# Altium PCB PCB_Project1.PcbDoc
Units mm, origin at the board's own origin, x right, y up, seen from the top; angles counter-clockwise.
Board outline 81.08 x 45.82 mm, 2 copper layers (Top Layer, Bottom Layer); 37 components, 25 nets, 139 pads, 5 vias.
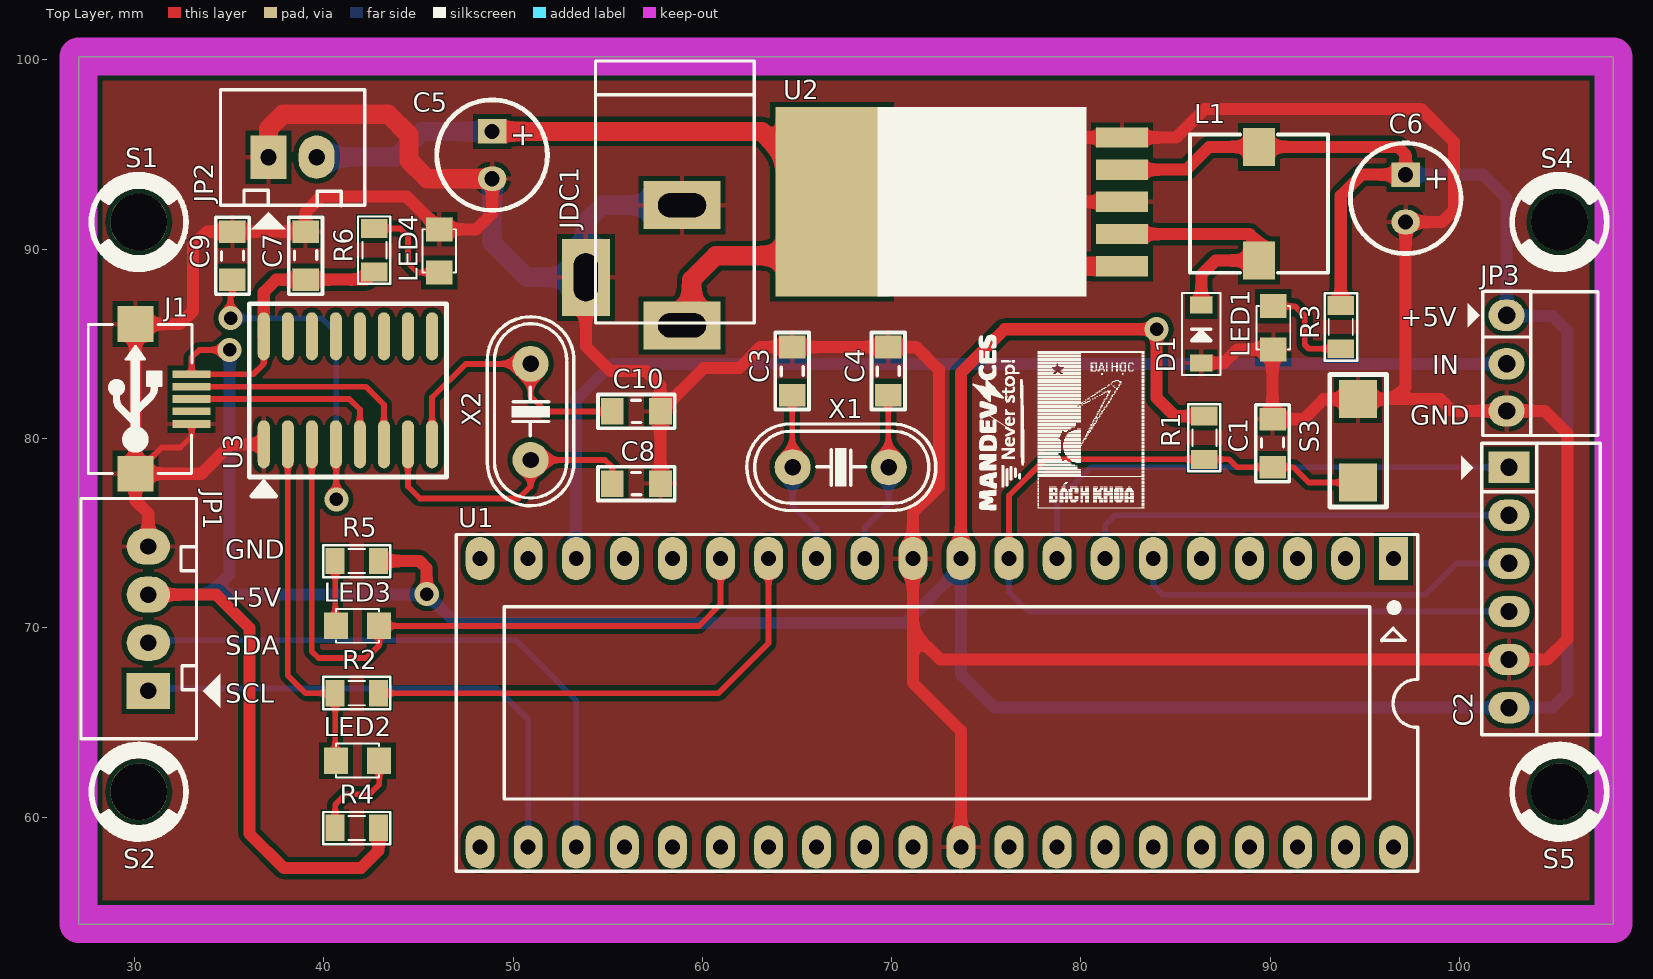
[diagram p0: Top Layer view]
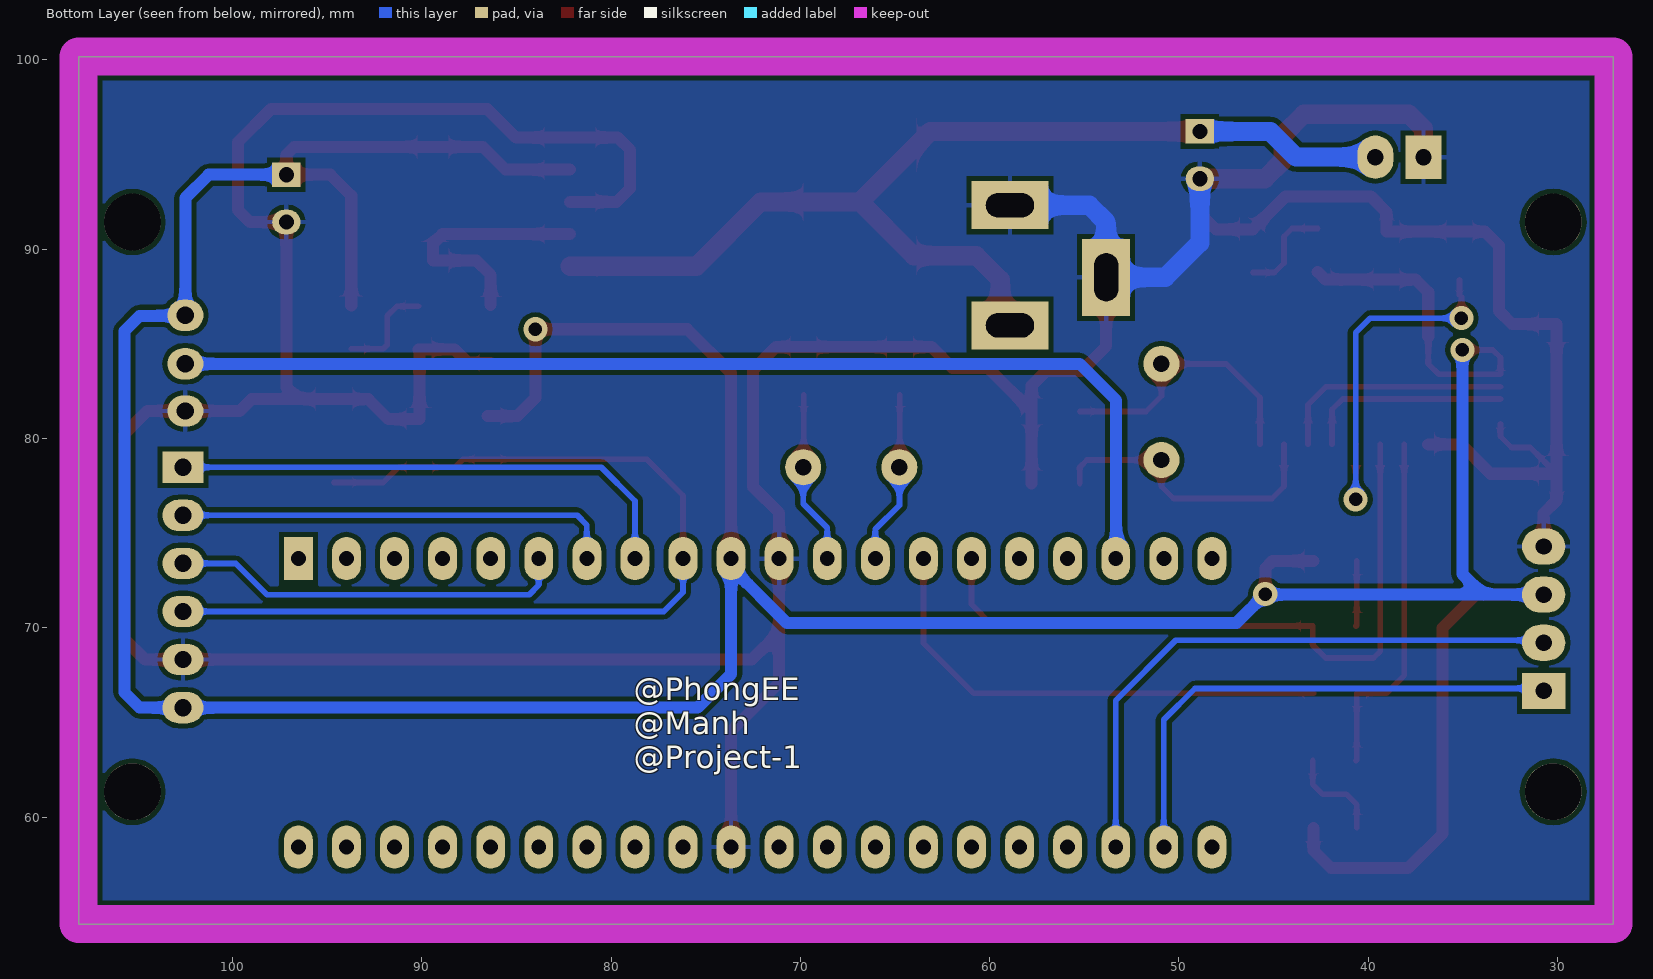
[diagram p1: Bottom Layer view, seen from below]
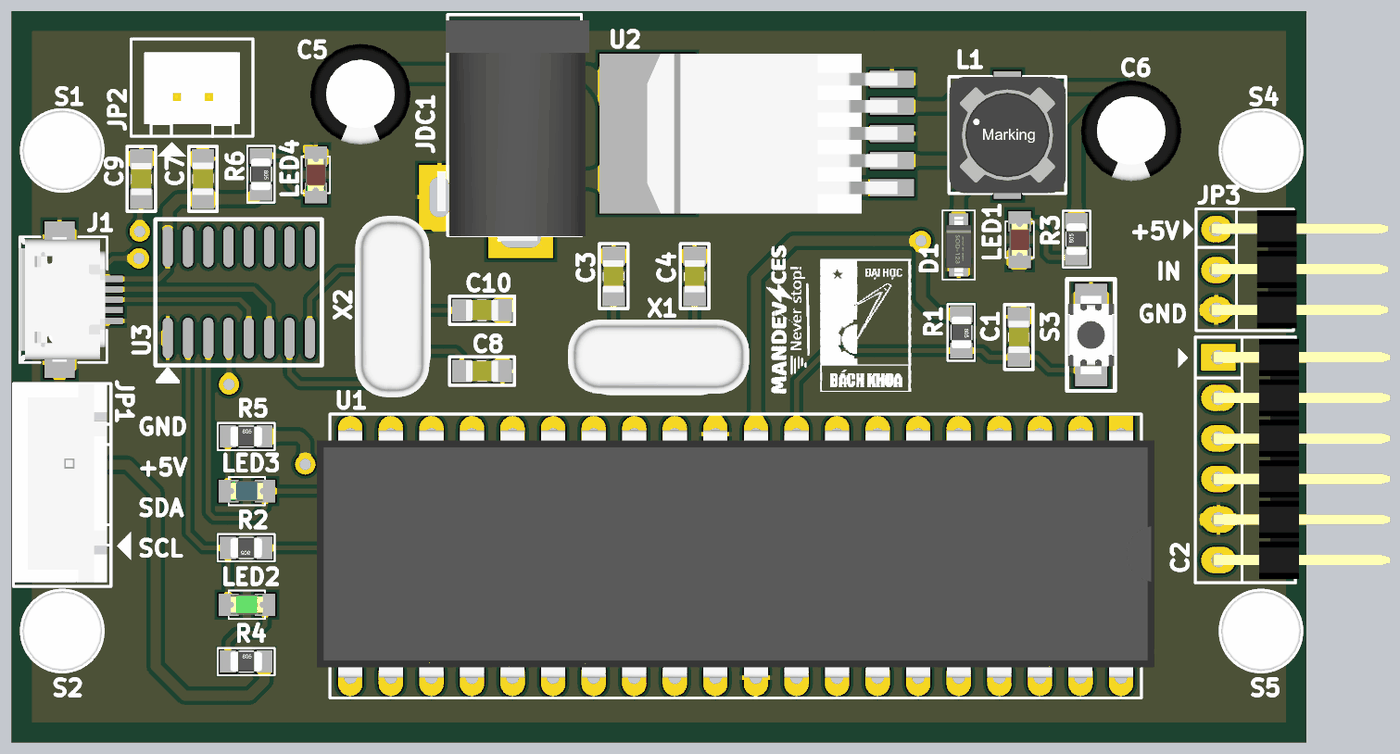
[diagram p2: 3D render of the assembled board from above, using the file's embedded part models]

## Layer stack, top to bottom
Top Solder: solder mask 0.0102, Solder Resist, Dk 3.5
Top Layer: signal copper 0.0356
Dielectric 1: dielectric 0.32, FR-4, Dk 4.8
Bottom Layer: signal copper 0.0356
Bottom Solder: solder mask 0.0102, Solder Resist, Dk 3.5

## Board outline
27.051,54.356 27.051,100.178 108.128,100.178 108.128,54.356

## Design rules (kind name [scope] priority, off if disabled: settings)
Clearance [All] p1: gap=0.254 ignorepadtopadclearanceinfootprint=TRUE
PolygonConnect [All] p1: connectstyle=Relief reliefconductorwidth=0.254 reliefentries=4 polygonreliefangle="90 Angle" airgapwidth=0.254
RoutingVias [All] p1: holewidth=1.016 width=1.27 viastyle="Through Hole" minholewidth=0.381 minwidth=1.27 maxholewidth=1.016 maxwidth=1.27
SolderMaskExpansion [All] p1: expansion=0.102
Width [All] p1: maxlimit=1.016 minlimit=0.305 preferedwidth=0.635
30 further rules are at their usual default settings.

## Classes and differential pairs
component class Master_Transmit: C7 C8 C9 C10 J1 LED2 LED3 LED4 R4 R5 R6 U3 X2
component class Master_Sensor: JP3
component class Master_Power_Supply: C5 C6 D1 JDC1 JP2 L1 LED1 R3 U2
component class Master_MCU: C1 C2 C3 C4 R1 R2 S1 S2 S3 S4 S5 U1 X1
component class Master_Display: JP1

## Components (designator, comment, footprint, x,y, rotation, side; value= is the part's Value field where it differs from the comment)
C1 "106" CAP_0805 90.095,79.756 r90 top value=33p
C2 "Header6" JP6H 102.616,78.486 r270 top
C3 "22pF" CAP_0805 64.77,83.566 r270 top value=33p
C4 "22pF" CAP_0805 69.85,83.566 r270 top value=33p
C5 "100uF/50V" C8mm 48.895,94.976 r270 top
C6 "220uF/50V" C8mm 97.155,92.69 r270 top
C7 "104" CAP_0805 39.014,89.662 r90 top value=33p
C8 "22pF" CAP_0805 56.515,77.597 r180 top value=33p
C9 "104" CAP_0805 35.204,89.662 r270 top value=33p
C10 "22pF" CAP_0805 56.515,81.407 r180 top value=33p
D1 "1N5822" DIO-SMD-123 86.36,85.522 r270 top value="Diode c?m 1N5408"
J1 "USB-5" USB-M1 33.02,82.093 r90 top
JDC1 "Jac DC" DC-IN 56.388,89.154 r270 top
JP1 "JP4" CON4 30.734,66.675 r90 top value="Connector 4"
JP2 "JP2" CON2 37.084,94.869 r0 top value="Connector 2"
JP3 "JP3" JP3H 102.489,86.512 r270 top value="Connector 3"
L1 "33.0 μH" L-SMD-M-7.3x4.5 89.408,92.408 r180 top
LED1 "LED" LED-0805-Red 90.17,86.995 r270 top value="LED 3 ly Single Colour"
LED2 "LED" LED-0805-Green 42.926,62.992 r180 top value="LED 3 ly Single Colour"
LED3 "LED" LED-0805-Blue 40.64,70.104 r0 top value="LED 3 ly Single Colour"
LED4 "LED" LED-0805-Red 46.101,88.771 r90 top value="LED 3 ly Single Colour"
R1 "10k" RES-SMD-0805 86.525,80.046 r270 top
R2 "1k5" RES-SMD-0805 41.745,66.548 r180 top
R3 "1k" RES-SMD-0805 93.726,85.89 r90 top
R4 "1k5" RES-SMD-0805 41.745,59.436 r0 top
R5 "1k5" RES-SMD-0805 41.745,73.533 r0 top
R6 "1k" RES-SMD-0805 42.672,89.952 r270 top
S1 "Screw" "Screw 3 small" 30.226,91.44 r0 top
S2 "Screw" "Screw 3 small" 30.226,61.341 r0 top
S3 "SW-SMD" "SW 3x2x4" 94.64,79.883 r90 top
S4 "Screw" "Screw 3 small" 105.283,91.44 r0 top
S5 "Screw" "Screw 3 small" 105.283,61.341 r0 top
U1 "ATmega32A-PU" DIP40/W0.6 96.52,73.66 r180 top
U2 "LM2976" TO263-5 82.144,92.505 r90 top
U3 "CH340G" SO16 41.275,82.55 r90 top
X1 "11.0592MHz" XT2 67.31,78.486 r180 top value=4Mhz
X2 "12Mhz" XT2 50.927,81.407 r270 top value=4Mhz

## Footprints (in the part's own frame and the unit in brackets; to place one, negate y for a bottom-side part, rotate by r counter-clockwise, add the part's x,y. Pads: shape width x height; smd on the part's side, far side on the other; paste and mask are expansions set on the pad)
C8mm [mm]
  rect 1.3x1.5 hole 0.8: 1(-1.25,0)
  oval 1.3x1.5 hole 0.8: 2(1.25,0)
  silkscreen extent -2.92,-2.92 2.92,2.92, body extent -3.15,-3.15 3.16,3.15, height 11.51
CAP_0805 [mm]
  rect 1.2x1.4 smd: 1(-1.27,-0.025) 2(1.27,-0.025)
  silkscreen extent -2.03,-0.91 2.03,0.86, body extent -1.01,-0.66 1.01,0.61, height 0.61
CON2 [mil] "CON2"
  rect 75x90 hole 34: 1(0,0)
  oval 75x90 hole 34: 2(100,0)
  silkscreen extent -100,-150 200,140, body extent -68,-70 168,107, height 236
CON4 [mil] "CON4"
  rect 75x90 hole 34: 1(0,0)
  oval 75x90 hole 34: 2(100,0) 3(200,0) 4(300,0)
  silkscreen extent -100,-150 400,140, body extent -90,-90 398,136, height 276
DC-IN [mil] "Jac DC input"
  rect 100x160 hole 50 slot 100 at 90 deg: 1(125,100) 2(-125,100)
  rect 160x100 hole 50 slot 100 at 0 deg: 3(25,-100)
  silkscreen extent -425,-80 120,250, body extent -410,-105 134,269, height 434
DIO-SMD-123 [mm]
  rect 0.9x1.2 smd: 1(1.524,0) 2(-1.524,0)
  silkscreen extent -2.16,-1.02 2.16,1.02, body extent -1.76,-0.8 1.94,0.8, height 1.25
DIP40/W0.6 [mil] "40 PIN, W 600mil, Pin to pin 100mil"
  rect 60x90 hole 31: 1(0,0)
  oval 60x90 hole 31: 2(100,0) 3(200,0) 4(300,0) 5(400,0) 6(500,0) 7(600,0) 8(700,0) 9(800,0) 10(900,0) 11(1000,0) 12(1100,0) 13(1200,0) 14(1300,0) 15(1400,0) 16(1500,0) 17(1600,0) 18(1700,0) 19(1800,0) 20(1900,0) 21(1900,600) 22(1800,600) 23(1700,600) 24(1600,600) 25(1500,600) 26(1400,600) 27(1300,600) 28(1200,600) 29(1100,600) 30(1000,600) 31(900,600) 32(800,600) 33(700,600) 34(600,600) 35(500,600) 36(400,600) 37(300,600) 38(200,600) 39(100,600) 40(0,600)
  silkscreen extent -50,-50 1950,650, body extent -82,-10 1982,600, height 224
JP3H [mil]
  oval 65x75 hole 36: 1(0,0) 2(101,0) 3(199,0)
  silkscreen extent -50,-81 250,190, body extent -47,-15 245,424, height 99
JP6H [mil]
  rect 65x85 hole 36: 1(0,0)
  oval 65x85 hole 36: 2(100,0) 3(200,0) 4(300,0) 5(400,0) 6(500,0)
  silkscreen extent -50,-99 556,190, body extent -46,-15 546,424, height 99
L-SMD-M-7.3x4.5 [mm] "WE-PDA SMD Shielded Power Inductor, 7345"
  rect 1.7x2 smd: 1(0,3) 2(0,-3)
  silkscreen extent -3.65,-3.65 3.65,3.65, body extent -3.65,-3.65 3.65,3.65, height 4.05
LED-0805-Blue [mil]
  rect 50x55 smd: 1(0,0) 2(90,0)
  silkscreen extent 0,-35 90,35, body extent 5,-25 85,25, height 43
LED-0805-Green [mil]
  rect 50x55 smd: 1(0,0) 2(90,0)
  silkscreen extent 0,-35 90,35, body extent 5,-25 85,25, height 43
LED-0805-Red [mil]
  rect 50x55 smd: 1(0,0) 2(90,0)
  silkscreen extent 0,-35 90,35, body extent 5,-25 85,25, height 43
RES-SMD-0805 [mil]
  rect 39.37x55 smd: 1(-45,0) 2(45,0)
  silkscreen extent -70,-34 70,33, body extent -39,-25 39,25, height 31
"Screw 3 small" [mm] "Hole 3mm, outline 5mm"
  round 3 hole 3 mask+0.1: 1(0,0)
  silkscreen extent -2.5,-2.5 2.5,2.5, body extent -2.5,-2.5 2.5,2.5, height 1.73
SO16 [mm]
  oval 2.54x0.635 smd: 1(-2.854,4.445) 2(-2.854,3.175) 3(-2.854,1.905) 4(-2.854,0.635) 5(-2.854,-0.635) 6(-2.854,-1.905) 7(-2.854,-3.175) 8(-2.854,-4.445) 9(2.854,-4.445) 10(2.854,-3.175) 11(2.854,-1.905) 12(2.854,-0.635) 13(2.854,0.635) 14(2.854,1.905) 15(2.854,3.175) 16(2.854,4.445)
  silkscreen extent -5.59,-5.21 4.57,5.21, body extent -3.47,-4.95 3.47,4.95, height 1.75
"SW 3x2x4" [mm]
  rect 2x2 smd: 1(-2.2,0) 2(2.2,0)
  silkscreen extent -3.5,-1.5 3.5,1.5, body extent -2.45,-1.45 2.45,1.45, height 2
TO263-5 [mm] "LM2576-SMD"
  rect 1.07x2.75 smd: 1(-3.4,-0.025) 2(-1.7,-0.025) 3(0,-0.025) 4(1.7,-0.025) 5(3.4,-0.025)
  rect 10x6 smd: 1(0,15.289)
  silkscreen extent -5,1.85 5,12.88, body extent -5,-0.38 5,15.29, height 4.79
USB-M1 [mm]
  rect 0.4x2 smd: 1(1.3,0) 2(0.65,0) 3(0,0) 4(-0.65,0) 5(-1.321,0)
  rect 1.9x1.9 smd: 5(-3.95,2.968) 5(3.95,2.968)
  silkscreen extent -3.94,-0.03 3.94,5.46, body extent -3.98,0.11 4,5.54, height 2.71
XT2 [mil] "Footpin for Crystal 2 pin"
  round 75 hole 34: 1(-100,0) 2(100,0)
  silkscreen extent -198,-90 195,90, body extent -233,-93 213,90, height 138

## Part data
C1 C3 C4 C7 C8 C9 C10: library part CapSMD, "Capacitor", LatestRevisionDate=17-Jul-2002, LatestRevisionNote="Re-released for DXP Platform.", PackageReference=RAD-0.3, Published=8-Jun-2000, Publisher="Altium Limited"
C2: "Header IDC, 6 x 1 Pin Vertical 2.54mm Pitch (Non-Boxed, Male)", Manufacturer="W¨¹rth Elektronik eiSos GmbH", partNo=613002143121, ComponentLink1 Description=Manufacturer, ComponentLink1URL=http://www.we-online.com, ComponentLink2 Description=Datasheet, ComponentLink2URL=http://katalog.we-online.de/em/datasheet/6130xx143121.pdf, Created by="Karrer Zheng", Created Date="29 March 2013", NoPins=02
C5 C6: library part "Cap Pol", "Polarized Capacitor (Axial)", LatestRevisionDate=17-Jul-2002, LatestRevisionNote="Re-released for DXP Platform.", PackageReference=POLAR0.8, Published=8-Jun-2000, Publisher="Altium Limited"
D1: "Schottky Rectifiers"
J1: Manufacturer=FCI, Manufacturer Part Number=10118193-0001LF, Supplier Part Number 1=609-4616-1-ND, .Checked PCB=RF, .Checked SCH=MM, .Creator=MM, Category="Connectors, Interconnects", ComponentLink1Description=http://portal.fciconnect.com/Comergent//fci/drawing/10118193.pdf, ComponentLink1URL=http://portal.fciconnect.com/Comergent//fci/drawing/10118193.pdf, Connector Type="USB - micro B", Features="Shielded, Solder Retention", Gender=Receptacle, Ingress Protection=-, Mounting Type="Surface Mount, Right Angle, Horizontal", Number of Contacts=5, Packaging="Cut Tape (CT)", Pricing 1="1=0.46, 10=0.433, 25=0.3712, 50=0.3156, 100=0.3032, 250=0.27224, 500=0.25988 (USD)", RoHS="RoHS Compliant", Specifications="USB 2.0", Stock 1=28642, Supplier 1=Digi-Key
JDC1: library part DCIN, "Jac DC input"
JP1: library part Con4, "Connector 4"
JP2: library part Con2, "Connector 2"
JP3: library part Con3, "Connector 3"
L1: library part L-SMD-1, Inductance="33.0 µH", Manufacturer="Wurth Elektronik", partNo=78477010, ComponentLink1Description=Manufacturer, ComponentLink1URL=http://www.we-online.de, ComponentLink2Description=Datasheet, ComponentLink2URL=http://katalog.we-online.de/pbs/datasheet/78477010.pdf, Created by="Baojun Chen", Created Date=Nov.2015
LED1 LED2 LED3 LED4: "LED Single colour Green and Red"
R1 R2 R3 R4 R5 R6: library part "Resistor - SMD", "Resistor", Manufacturer="Generic Components", Class=Passive, Published=08/06/2000, Publisher="Altium Hobart Technology Centre"
S3: "Switch", LatestRevisionDate=17-Jul-2002, LatestRevisionNote="Re-released for DXP Platform.", PackageReference=SPST-2, Published=24-Mar-1999, Publisher="Altium Limited"
U1: "8-Bit AVR Microcontroller with 32K Bytes of In-System Programmable Flash Memory", Supplier Part Number 1=ATMEGA32-16PC-ND, Code_JEDEC=MS-011-AC, ComponentLink1Description=Datasheet, ComponentLink1URL=http://www.atmel.com/dyn/resources/prod_documents/doc2503.pdf, ComponentLink2Description="Atmel.com Home", ComponentLink2URL=http://www.atmel.com, DatasheetVersion=2503C-AVR-10/02, PackageDescription="40-lead (0.600\"/15.24mm Wide) Plastic Dual Inline Package (PDIP)", PackageReference=40P6, PackageVersion="revB, Sep-2001", Published=17-Sep-2003, Publisher="Altium Limited", Supplier 1=Digi-Key, Supplier 2=Mouser, Supplier Part Number 2=556-ATMEGA32-16PC
U2: library part LM2596, Max Input Voltage="12 V", Max Output Current="3 (6.0 peak) A", Max Output Voltage=mV, Temperature Range="-40 to +125 degC", Category=IC-Power, Min Input Voltage=mV, Min Output Voltage=mV, Mounting Technology="Surface Mount", Status=Unreleased, Supply Voltage=mV
U3: "High and Low Side Driver", ComponentLink1Description="Manufacturer Link", ComponentLink1URL=http://www.irf.com/, ComponentLink2Description=Datasheet, ComponentLink2URL=http://www.irf.com/product-info/datasheets/data/ir2110.pdf, DatasheetVersion=PD60147J, LatestRevisionDate=04-Mar-2005, LatestRevisionNote="Stylized 3D Model Added.", Note="Pins 4, 8 and 14 are not connected", PackageDescription="DIP; 14 Leads; Row Spacing 7.62 mm; Pitch 2.54 mm", PackageReference=PDIP14, Published=8-Jun-2000, Publisher="Altium Limited"
X1 X2: library part XT2, "Crystal For all Crystal 2pin."

## Via types
v1: diameter 1.27, hole 0.711, Top Layer to Bottom Layer, 5 vias

## Nets (pads, with @x,y where several pads share a name; then routed paths per layer and width w, separated by ;. In a path a pad name is that pad's centre, name@x,y a point inside that pad or via, vN(x,y) a via of type N, cw(c..) or ccw(c..) an arc to the next point about the centre after c; other vN are vias at no path point)
+5: C2.6 C6.1 C7.1 J1.1 JP1.3 JP3.1 L1.2 R1.1 R3.2 R4.2 R5.2 R6.2 U1.10 U2.4 U3.16 | length 233.5
  Top Layer w0.305: v1(35.027,84.684) 33.426,84.684 33.02,84.277 J1.1 36.276,83.393 36.83,83.947 U3.16
  Top Layer w0.635: JP1.3 34.315,71.755 36.068,70.002 36.068,59.131 37.897,57.302 41.961,57.302 42.888,58.229 R4.2 ; U3.16 36.83,87.732 37.49,88.392 C7.1 42.254,88.392 R6.2 ; R5.2 45.06,73.533 45.441,73.152 v1(45.441,71.78) ; U1.10 73.66,83.464 75.971,85.776 v1(83.998,85.776) 83.998,82.144 84.952,81.19 R1.1 ; U2.4 85.569,94.205 86.772,95.408 L1.2 96.743,95.408 97.155,94.996 C6.1 94.829,93.94 93.726,92.837 R3.2
  Bottom Layer w0.635: JP1.3 33.934,71.755 ; v1(35.027,84.684) 35.027,72.847 33.934,71.755 ; U1.10 U1.10@73.66,73.203 ; C6.1 101.259,93.94 102.489,92.71 JP3.1 102.514,86.487 104.902,86.487 105.715,85.674 105.715,66.599 104.902,65.786 C2.6 75.438,65.786 73.66,67.564 U1.10@73.66,73.203 ; 33.934,71.755 45.415,71.755 v1(45.441,71.78) 46.965,70.256 70.714,70.256 U1.10@73.66,73.203
+12: C5.1 JDC1.1 JP2.2 U2.1 | length 57.8
  Top Layer w1.016: C5.1 63.134,96.226 U2.1@66.855,92.505 ; JDC1.1 59.436,86.487 59.436,88.392 60.706,89.662 64.012,89.662 U2.1@66.855,92.505 ; U2.1@82.169,89.105 75.487,89.105 72.087,92.505 U2.1@66.855,92.505
  Bottom Layer w1.016: JP2.2 43.815,94.869 45.172,96.226 C5.1
CH340_D+: J1.3 U3.5 | length 11
  Top Layer w0.305: J1.3 41.351,82.093 41.91,81.534 U3.5
CH340_D-: J1.2 U3.6 | length 12.6
  Top Layer w0.305: J1.2 42.225,82.743 43.18,81.788 U3.6
GND: C1.2 C2.5 C3.1 C4.1 C5.2 C6.2 C7.2 C8.1 C9.1 C10.1 D1.1 J1.5 JDC1.2 JDC1.3 JP1.4 JP2.1 JP3.3 LED1.2 LED4.2 S3.2 U1.11 U1.31 U2.3 U2.5 U3.1 | length 256.3
  Top Layer w0.305: J1.5@30.052,78.143 31.437,79.527 32.436,79.527 33.02,80.112 J1.5@33.02,80.772
  Top Layer w0.635: JP1.4 30.734,76.048 30.052,76.729 J1.5@30.052,78.143 ; U3.1 35.094,79.696 33.54,78.143 J1.5@30.052,78.143 ; C5.2 48.895,91.897 48.055,91.057 LED4.2 44.372,92.786 39.853,92.786 39.04,91.973 C7.2 C9.1 33.833,90.932 33.096,90.195 33.096,86.741 32.398,86.043 30.052,86.043 J1.5@30.052,78.143 ; JDC1.3 53.848,84.887 55.169,83.566 57.023,83.566 57.785,82.804 C10.1 ; C8.1 C10.1 ; U1.31 73.66,64.567 71.12,67.107 71.12,69.774 ; U2.3 79.707,92.505 78.994,93.218 78.994,95.25 79.649,95.905 U2.5 85.034,95.905 86.538,97.409 97.968,97.409 99.72,95.656 99.72,92.075 99.085,91.44 C6.2 97.155,82.702 96.536,82.083 ; D1.1 87.554,83.998 88.265,84.709 LED1.2 90.121,84.66 C1.2 91.77,81.026 92.827,82.083 S3.2 96.536,82.083 ; C10.1 60.071,83.718 61.951,83.718 63.068,84.836 C3.1 C4.1 71.298,84.836 72.492,83.642 72.492,77.445 71.12,76.073 U1.11 71.12,69.774 ; 71.12,69.774 72.568,68.326 C2.5 104.623,68.326 105.715,69.418 105.715,80.239 104.496,81.458 JP3.3 99.619,81.458 98.994,82.083 96.536,82.083
  Top Layer w1.016: JP2.1 37.084,96.368 37.846,97.13 43.409,97.13 44.501,96.037 44.501,94.691 45.466,93.726 C5.2
  Bottom Layer w1.016: C5.2 48.895,90.348 50.724,88.519 JDC1.3 53.848,91.44 54.737,92.329 JDC1.2
NetC2_1: C2.1 U1.8 | length 27.7
  Bottom Layer w0.305: U1.8 78.74,76.708 80.518,78.486 C2.1
NetC2_2: C2.2 U1.7 | length 23.3
  Bottom Layer w0.305: U1.7 81.28,75.438 81.788,75.946 C2.2
NetC2_3: C2.3 U1.6 | length 21.1
  Bottom Layer w0.305: U1.6 83.82,72.263 84.328,71.755 98.171,71.755 99.822,73.406 C2.3
NetC3_2: C3.2 U1.13 X1.2 | length 9.2
  Top Layer w0.305: C3.2 64.745,78.511 X1.2
  Bottom Layer w0.305: X1.2 64.77,76.479 66.04,75.209 U1.13
NetC4_2: C4.2 U1.12 X1.1 | length 9.2
  Top Layer w0.305: C4.2 69.825,78.511 X1.1
  Bottom Layer w0.305: U1.12 68.58,75.286 69.85,76.556 X1.1
NetC8_2: C8.2 U3.7 X2.2 | length 16
  Top Layer w0.305: U3.7 44.45,77.47 45.085,76.835 50.292,76.835 50.927,77.47 X2.2 54.864,78.867 55.245,78.486 C8.2
NetC9_2: C9.2 U3.4 | length 19.7
  Top Layer w0.305: v1(35.077,86.36) 35.077,87.478 35.179,87.579 C9.2 ; U3.4 40.665,79.671 v1(40.665,76.784)
  Bottom Layer w0.305: v1(35.077,86.36) 39.903,86.36 40.665,85.598 v1(40.665,76.784)
NetC10_2: C10.2 U3.8 X2.1 | length 14.8
  Top Layer w0.305: U3.8 45.72,82.169 47.498,83.947 X2.1 50.927,82.245 51.74,81.432 C10.2
NetD1_2: D1.2 L1.1 U2.2 | length 13.3
  Top Layer w0.635: U2.2 88.9,90.805 89.408,90.297 L1.1 87.122,89.408 86.36,88.646 D1.2
NetJP1_1: JP1.1 U1.22 | length 27.5
  Bottom Layer w0.305: JP1.1@30.734,66.802 49.149,66.802 50.8,65.151 U1.22
NetJP1_2: JP1.2 U1.23 | length 31.7
  Bottom Layer w0.305: JP1.2@30.734,69.342 50.165,69.342 53.34,66.167 U1.23
NetJP3_2: JP3.2 U1.18 | length 58.6
  Bottom Layer w0.635: U1.18 53.315,73.685 U1.18@53.315,73.812 ; U1.18@53.467,73.66 U1.18@53.315,73.812 ; JP3.2 55.245,83.947 53.315,82.017 U1.18@53.315,73.812
NetLED1_1: LED1.1 R3.1 | length 5.4
  Top Layer w0.305: LED1.1 91.313,86.995 91.821,86.487 91.821,84.963 92.037,84.747 R3.1
NetLED2_1: LED2.1 R4.1 | length 5.3
  Top Layer w0.305: R4.1 40.602,60.668 41.148,61.214 42.418,61.214 42.926,61.722 LED2.1
NetLED2_2: LED2.2 R2.2 U3.2 | length 18.7
  Top Layer w0.305: U3.2 38.1,67.488 39.04,66.548 R2.2 40.602,63.03 LED2.2
NetLED3_1: LED3.1 R5.1 | length 3.4
  Top Layer w0.305: R5.1 40.602,70.142 LED3.1
NetLED3_2: LED3.2 U1.15 U3.3 | length 36.9
  Top Layer w0.305: U3.3 39.37,68.758 39.726,68.402 42.24,68.402 42.926,69.088 LED3.2 59.817,70.104 60.96,71.247 U1.15
NetLED4_1: LED4.1 R6.1 | length 5.2
  Top Layer w0.305: R6.1 44.032,91.096 44.45,90.678 44.45,89.281 44.96,88.771 LED4.1
NetR2_1: R2.1 U1.14 | length 26.2
  Top Layer w0.305: R2.1 60.858,66.548 63.5,69.19 U1.14
RST: C1.1 C2.4 R1.2 S3.1 U1.9 | length 51.7
  Top Layer w0.305: U1.9 76.2,76.987 78.116,78.904 R1.2 87.822,78.904 88.24,78.486 C1.1 91.237,78.486 92.04,77.683 S3.1
  Bottom Layer w0.305: U1.9 76.2,71.882 77.216,70.866 C2.4
pads on no net: J1.4 S1.1 S2.1 S4.1 S5.1 U1.1 U1.2 U1.3 U1.4 U1.5 U1.16 U1.17 U1.19 U1.20 U1.21 U1.24 U1.25 U1.26 U1.27 U1.28 U1.29 U1.30 U1.32 U1.33 U1.34 U1.35 U1.36 U1.37 U1.38 U1.39 U1.40 U3.9 U3.10 U3.11 U3.12 U3.13 U3.14 U3.15

## Polygon pours and split planes (outlines as drawn)
GND on Top Layer (solid, remove dead copper, pour order 16): 27.051,100.178 27.051,54.356 108.128,54.356 108.128,100.178
no net on Top Layer (solid, remove dead copper, pour order 14): 27.051,100.178
GND on Bottom Layer (solid, remove dead copper, pour order 18): 27.051,100.178 27.051,54.356 27.229,54.534 108.128,54.534 108.128,100.178

## Keep-outs
Keep-Out Layer:
  the board outline again, w2

## Silkscreen, mask and mechanical layers (free items; w line width, h text height)
Top Overlay:
  drawing of 1604 lines, arcs and shapes, not listed
  text "+5V" at 96.901,85.928 h1
  text "IN" at 98.552,83.388 h1
  text "GND" at 97.409,80.721 h1
  text "GND" at 34.798,73.66 h1
  text "+5V" at 34.798,71.12 h1
  text "SDA" at 34.798,68.58 h1
  text "SCL" at 34.798,66.04 h1
Bottom Overlay:
  text "@PhongEE / @Manh / @Project-1" at 78.791,62.586 h1.2

## Dimensions
27.051,100.178 to 27.051,54.356 on Mechanical 15
27.051,100.178 to 108.128,100.178 on Mechanical 15

## Text inside footprints (layer, text, board x,y; h text height)
C5: Top Overlay "+" at 50.013,96.678 h1.2 r270
C6: Top Overlay "+" at 98.273,94.392 h1.2 r270